# Altium PCB HotBed-24V.PcbDoc (part 2 of 3)
Units mil, origin at the board's own origin, x right, y up, seen from the top; angles counter-clockwise.
Board outline 5171.49 x 4724.57 mil, 2 copper layers (Top Layer, Bottom Layer); 4 components, 1 nets, 12 pads, 0 vias.
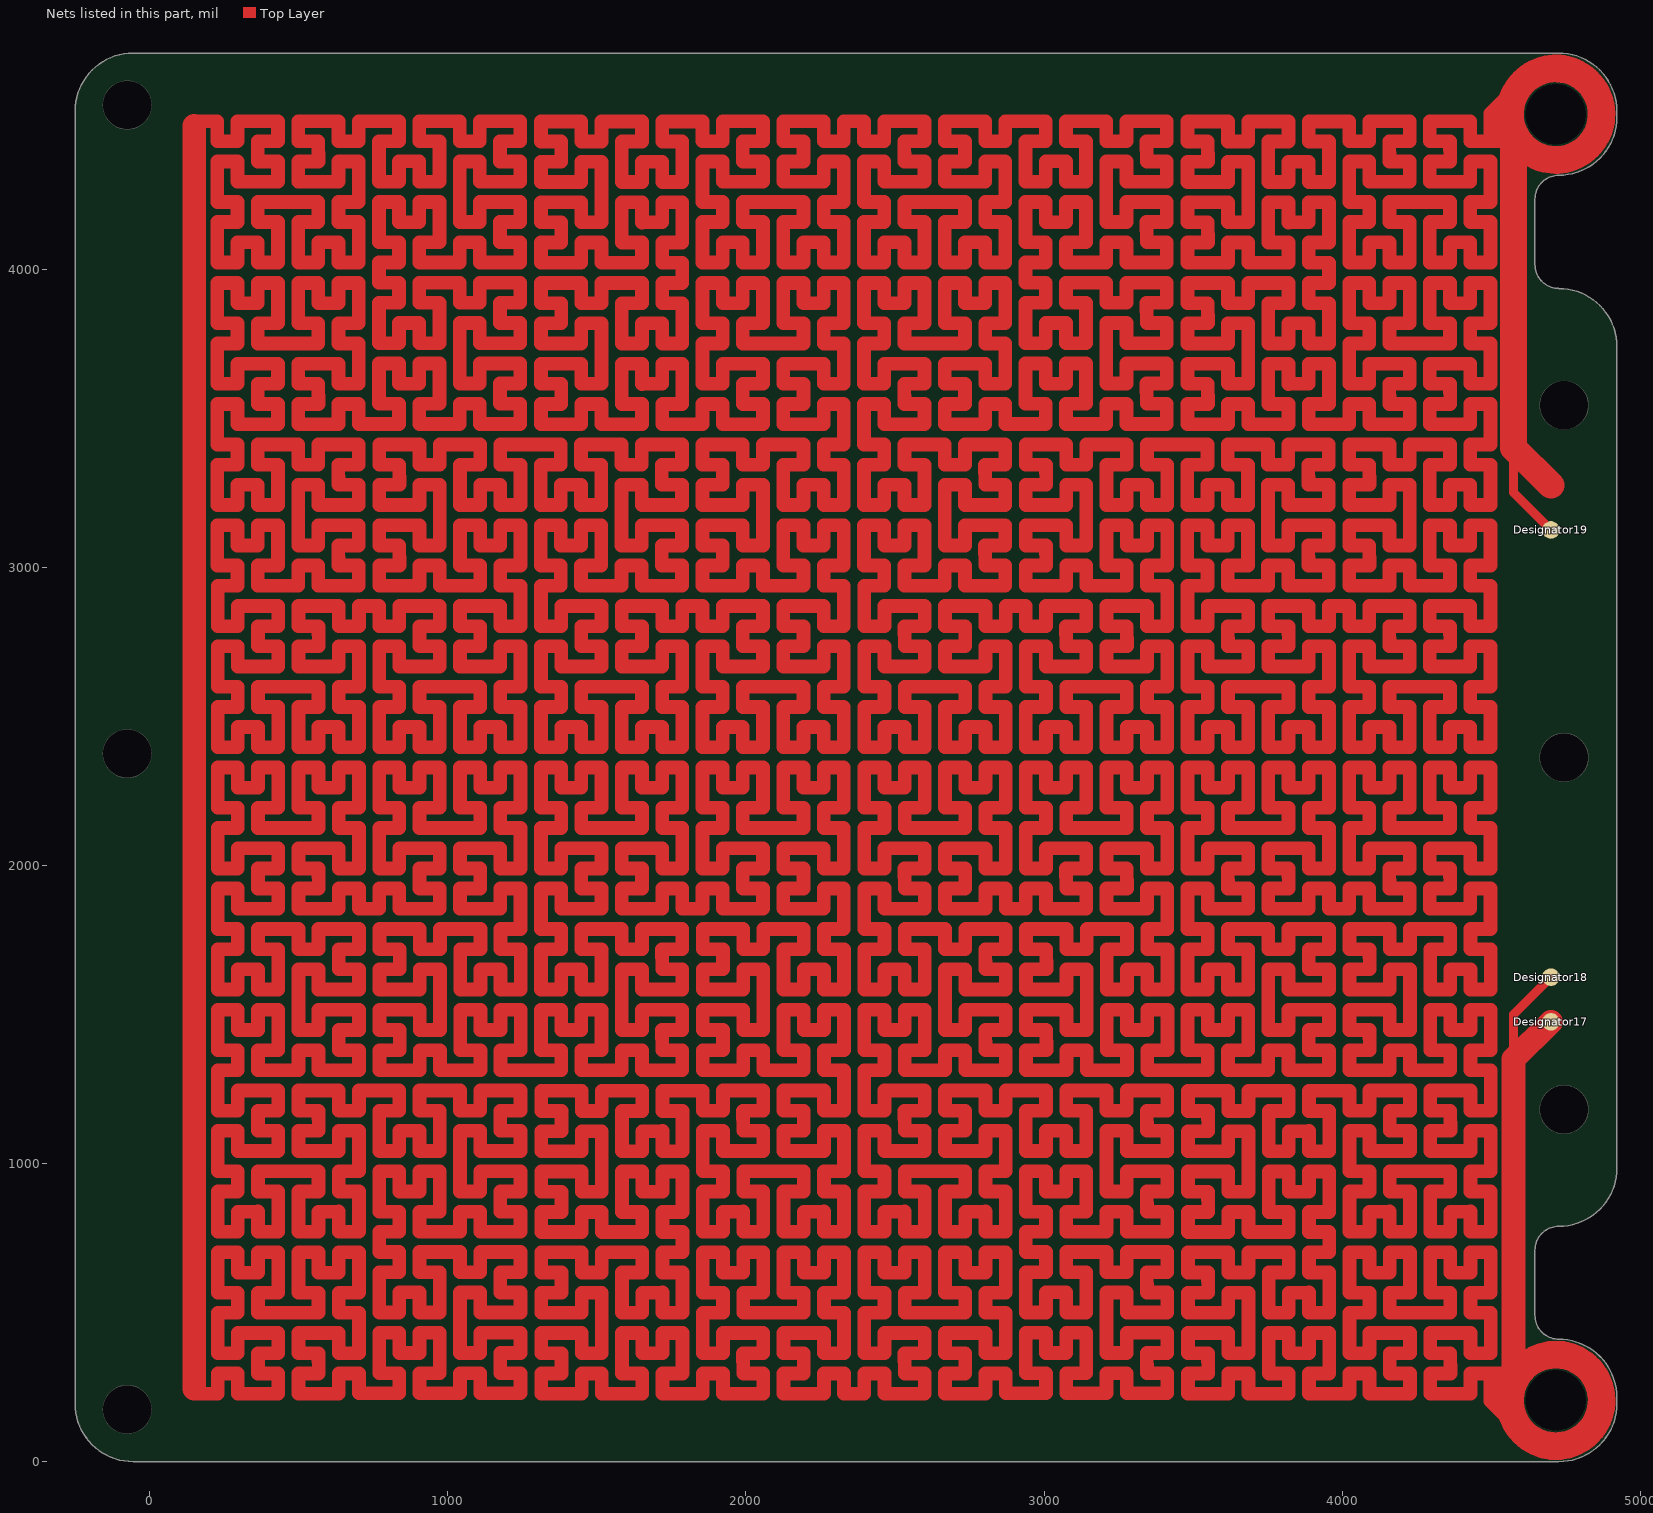
[diagram p2: the nets of this part, all layers, seen from the top]

## Nets (pads, with @x,y where several pads share a name; then routed paths per layer and width w, separated by ;. In a path a pad name is that pad's centre, name@x,y a point inside that pad or via, vN(x,y) a via of type N, cw(c..) or ccw(c..) an arc to the next point about the centre after c; other vN are vias at no path point) (continued)
Bed: (continued)
  Top Layer w46.06: 149.41,228.15 228.15,228.15 228.15,295.87 295.87,295.87 295.87,228.15 431.3,228.15 431.3,295.87 363.58,295.87 363.15,363.58 ; 149.41,4496.26 227.17,4496.26 227.17,4428.54 294.88,4428.54 294.88,4496.26 430.32,4496.26 430.32,4428.54 362.6,4428.54 ; 294.88,3072.8 362.6,3073.23 362.6,3140.95 430.32,3140.95 430.32,3005.51 362.6,3005.51 362.6,2937.8 498.03,2937.8 498.03,3005.51 565.75,3005.51 565.75,2937.8 701.18,2937.8 701.18,3005.51 633.47,3005.51 633.03,3073.23 ; 294.88,3073.23 294.88,3140.95 227.17,3140.95 227.17,3005.51 294.88,3005.51 294.88,2937.8 228.15,2937.8 228.15,2802.36 295.87,2802.36 295.87,2870.08 431.3,2870.08 431.3,2802.36 363.58,2802.36 ; 294.88,3885.39 362.6,3885.83 362.6,3953.54 430.32,3953.54 430.32,3818.11 362.6,3818.11 362.6,3750.39 565.75,3750.39 565.75,3818.11 498.03,3818.11 498.03,3953.54 565.75,3953.54 565.75,3885.83 ; 294.88,3885.83 294.88,3953.54 227.17,3953.54 227.17,3818.11 294.88,3818.11 294.88,3750.39 227.17,3750.39 227.17,3614.96 294.88,3614.96 294.88,3682.68 430.32,3682.68 430.32,3614.96 362.6,3614.96 ; 295.87,634.02 363.58,634.45 363.58,702.17 431.3,702.17 431.3,566.73 363.58,566.73 363.58,499.02 566.73,499.02 566.73,566.73 499.02,566.73 499.02,702.17 566.73,702.17 566.73,634.45 ; 295.87,634.45 295.87,702.17 228.15,702.17 228.15,566.73 295.87,566.73 295.87,499.02 228.15,499.02 228.15,363.58 295.87,363.58 295.87,431.3 431.3,431.3 431.3,363.58 363.58,363.58 ; 295.87,1447.6 363.58,1448.03 363.58,1515.75 431.3,1515.75 431.3,1380.32 363.58,1380.32 363.58,1312.6 499.02,1312.6 499.02,1380.32 566.73,1380.32 566.73,1312.6 702.17,1312.6 702.17,1380.32 634.45,1380.32 634.02,1448.03 ; 295.87,1448.03 295.87,1515.75 228.15,1515.75 228.15,1380.32 295.87,1380.32 295.87,1312.6 228.15,1312.6 228.15,1177.17 295.87,1177.17 295.87,1244.88 431.3,1244.88 431.3,1177.17 363.58,1177.17 ; 295.87,2260.2 363.58,2260.63 363.58,2328.35 431.3,2328.35 431.3,2192.91 363.58,2192.91 363.58,2125.2 566.73,2125.2 566.73,2192.91 499.02,2192.91 499.02,2328.35 566.73,2328.35 566.73,2260.63 ; 295.87,2260.63 295.87,2328.35 228.15,2328.35 228.15,2192.91 295.87,2192.91 295.87,2125.2 228.15,2125.2 228.15,1989.76 295.87,1989.76 295.87,2057.48 431.3,2057.48 431.3,1989.76 363.58,1989.76 ; 362.17,3614.96 362.6,3547.25 430.32,3547.25 430.32,3479.53 294.88,3479.53 294.88,3547.25 227.17,3547.25 227.17,3411.81 294.88,3411.81 294.88,3344.1 227.17,3344.1 227.17,3208.66 294.88,3208.66 294.88,3276.38 362.6,3276.81 ; 362.17,4428.54 362.6,4360.83 430.32,4360.83 430.32,4293.11 294.88,4293.11 294.88,4360.83 227.17,4360.83 227.17,4225.39 294.88,4225.39 294.88,4157.68 227.17,4157.68 227.17,4022.25 294.88,4022.25 294.88,4089.96 362.6,4090.39 ; 362.6,3276.38 362.6,3208.66 430.32,3208.66 430.32,3344.1 362.6,3344.1 362.6,3411.81 498.03,3411.81 498.03,3344.1 565.75,3344.1 565.75,3411.81 701.18,3411.81 701.18,3344.1 633.47,3344.1 ; 362.6,4089.96 362.6,4022.25 430.32,4022.25 430.32,4157.68 362.6,4157.68 362.6,4225.39 565.75,4225.39 565.75,4157.68 498.03,4157.68 498.03,4022.25 565.75,4022.25 565.75,4089.96 633.47,4090.39 ; 363.15,1177.17 363.58,1109.45 431.3,1109.45 431.3,1041.73 295.87,1041.73 295.87,1109.45 228.15,1109.45 228.15,974.02 295.87,974.02 295.87,906.3 228.15,906.3 228.15,770.87 295.87,770.87 295.87,838.58 363.58,839.02 ; 363.15,1989.76 363.58,1922.05 431.3,1922.05 431.3,1854.33 295.87,1854.33 295.87,1922.05 228.15,1922.05 228.15,1786.62 295.87,1786.62 295.87,1718.9 228.15,1718.9 228.15,1583.47 295.87,1583.47 295.87,1651.18 363.58,1651.62 ; 363.15,2802.36 363.58,2734.65 431.3,2734.65 431.3,2666.93 295.87,2666.93 295.87,2734.65 228.15,2734.65 228.15,2599.21 295.87,2599.21 295.87,2531.5 228.15,2531.5 228.15,2396.06 295.87,2396.06 295.87,2463.78 363.58,2464.21 ; 363.58,838.58 363.58,770.87 431.3,770.87 431.3,906.3 363.58,906.3 363.58,974.02 566.73,974.02 566.73,906.3 499.02,906.3 499.02,770.87 566.73,770.87 566.73,838.58 634.45,839.02 ; 363.58,1651.18 363.58,1583.47 431.3,1583.47 431.3,1718.9 363.58,1718.9 363.58,1786.62 499.02,1786.62 499.02,1718.9 566.73,1718.9 566.73,1786.62 702.17,1786.62 702.17,1718.9 634.45,1718.9 ; 363.58,2463.78 363.58,2396.06 431.3,2396.06 431.3,2531.5 363.58,2531.5 363.58,2599.21 566.73,2599.21 566.73,2531.5 499.02,2531.5 499.02,2396.06 566.73,2396.06 566.73,2463.78 634.45,2464.21 ; 565.75,3547.25 498.03,3547.25 498.03,3479.53 633.47,3479.53 633.47,3547.25 701.18,3547.25 701.18,3480.51 836.61,3480.51 836.61,3548.23 768.9,3548.23 768.9,3683.66 836.61,3683.66 836.61,3615.95 ; 565.75,3885.39 633.47,3885.83 633.47,3953.54 701.18,3953.54 701.18,3818.11 633.47,3818.11 633.47,3750.39 701.18,3750.39 701.18,3614.96 633.47,3614.96 633.47,3682.68 498.03,3682.68 498.03,3614.96 565.75,3614.96 566.18,3547.25 ; 565.75,4360.83 498.03,4360.83 498.03,4293.11 633.47,4293.11 633.47,4360.83 701.18,4360.83 701.18,4225.39 633.47,4225.39 633.47,4157.68 701.18,4157.68 701.18,4022.25 633.47,4022.25 633.47,4089.96 ; 566.18,4360.83 565.75,4428.54 498.03,4428.54 498.03,4496.26 633.47,4496.26 633.47,4428.54 701.18,4428.54 701.18,4496.26 836.62,4496.26 836.62,4428.54 768.9,4428.54 768.9,4293.11 836.62,4293.11 836.62,4360.83 904.33,4361.26 ; 566.73,295.87 499.02,295.87 499.02,228.15 634.45,228.15 634.45,295.87 702.17,295.87 702.17,229.13 837.6,229.13 837.6,296.85 769.88,296.85 769.88,432.28 837.6,432.28 837.6,364.57 ; 566.73,634.02 634.45,634.45 634.45,702.17 702.17,702.17 702.17,566.73 634.45,566.73 634.45,499.02 702.17,499.02 702.17,363.58 634.45,363.58 634.45,431.3 499.02,431.3 499.02,363.58 566.73,363.58 567.17,295.87 ; 566.73,1109.45 499.02,1109.45 499.02,1041.73 634.45,1041.73 634.45,1109.45 702.17,1109.45 702.17,974.02 634.45,974.02 634.45,906.3 702.17,906.3 702.17,770.87 634.45,770.87 634.45,838.58 ; 566.73,1922.05 499.02,1922.05 499.02,1854.33 634.45,1854.33 634.45,1922.05 702.17,1922.05 702.17,1854.33 769.88,1854.33 769.88,1922.05 837.6,1922.05 837.6,1854.33 973.03,1854.33 973.03,1922.05 905.32,1922.05 904.88,1989.76 ; 566.73,2260.2 634.45,2260.63 634.45,2328.35 702.17,2328.35 702.17,2192.91 634.45,2192.91 634.45,2125.2 702.17,2125.2 702.17,1989.76 634.45,1989.76 634.45,2057.48 499.02,2057.48 499.02,1989.76 566.73,1989.76 567.17,1922.05 ; 566.73,2734.65 499.02,2734.65 499.02,2666.93 634.45,2666.93 634.45,2734.65 702.17,2734.65 702.17,2599.21 634.45,2599.21 634.45,2531.5 702.17,2531.5 702.17,2396.06 634.45,2396.06 634.45,2463.78 ; 567.17,1109.45 566.73,1177.17 499.02,1177.17 499.02,1244.88 634.45,1244.88 634.45,1177.17 702.17,1177.17 702.17,1244.88 837.6,1244.88 837.6,1177.17 769.88,1177.17 769.88,1041.73 837.6,1041.73 837.6,1109.45 905.32,1109.88 ; 567.17,2734.65 566.73,2802.36 499.02,2802.36 499.02,2870.08 634.45,2870.08 634.45,2802.36 702.17,2802.36 702.17,2870.08 769.88,2870.08 769.88,2802.36 837.6,2802.36 837.6,2870.08 973.03,2870.08 973.03,2802.36 905.32,2802.36 ; 633.03,3344.1 633.47,3276.38 701.18,3276.38 701.18,3208.66 565.75,3208.66 565.75,3276.38 498.03,3276.38 498.03,3073.23 565.75,3073.23 565.75,3140.95 701.18,3140.95 701.18,3073.23 633.47,3073.23 ; 634.02,1718.9 634.45,1651.18 702.17,1651.18 702.17,1583.47 566.73,1583.47 566.73,1651.18 499.02,1651.18 499.02,1448.03 566.73,1448.03 566.73,1515.75 702.17,1515.75 702.17,1448.03 634.45,1448.03 ; 836.61,3615.51 904.33,3615.95 904.33,3683.66 972.05,3683.66 972.05,3548.23 904.33,3548.23 904.33,3480.51 1039.76,3480.51 1039.76,3548.23 1107.48,3548.23 1107.48,3480.51 1242.91,3480.51 1242.91,3548.23 1175.2,3548.23 1174.76,3615.95 ; 836.62,4157.24 904.33,4157.68 904.33,4225.39 972.05,4225.39 972.05,4089.96 904.33,4089.96 904.33,4022.24 1039.76,4022.24 1039.76,4089.96 1107.48,4089.96 1107.48,4022.25 1242.91,4022.25 1242.91,4089.96 1175.2,4089.96 1174.76,4157.68 ; 836.62,4157.68 836.62,4225.39 768.9,4225.39 768.9,4089.96 836.62,4089.96 836.62,4022.24 768.9,4022.24 768.9,3954.53 836.61,3954.53 836.61,3886.81 768.9,3886.81 768.9,3751.38 836.61,3751.38 836.61,3819.1 904.33,3819.53 ; 837.6,364.13 905.32,364.57 905.32,432.28 973.03,432.28 973.03,296.85 905.32,296.85 905.32,229.13 1040.75,229.13 1040.75,296.85 1108.47,296.85 1108.47,229.13 1243.9,229.13 1243.9,296.85 1176.18,296.85 1175.75,364.57 ; 837.6,905.87 905.32,906.3 905.32,974.02 973.03,974.02 973.03,838.58 905.32,838.58 905.32,770.87 1040.75,770.87 1040.75,838.58 1108.47,838.58 1108.47,770.87 1243.9,770.87 1243.9,838.58 1176.18,838.58 1175.75,906.3 ; 837.6,906.3 837.6,974.02 769.88,974.02 769.88,838.58 837.6,838.58 837.6,770.87 769.88,770.87 769.88,703.15 837.6,703.15 837.6,635.43 769.88,635.43 769.88,500 837.6,500 837.6,567.72 905.32,568.15 ; 837.6,2260.2 905.32,2260.63 905.32,2328.35 973.03,2328.35 973.03,2192.91 905.32,2192.91 905.32,2125.2 1108.47,2125.2 1108.47,2192.91 1040.75,2192.91 1040.75,2328.35 1108.47,2328.35 1108.47,2260.63 ; 837.6,2260.63 837.6,2328.35 769.88,2328.35 769.88,2192.91 837.6,2192.91 837.6,2125.2 769.88,2125.2 769.88,1989.76 837.6,1989.76 837.6,2057.48 973.03,2057.48 973.03,1989.76 905.32,1989.76 ; 837.6,3005.51 769.88,3005.51 769.88,2937.8 905.32,2937.8 905.32,3005.51 973.03,3005.51 973.03,2937.8 1108.47,2937.8 1108.47,3005.51 1040.75,3005.51 1040.75,3140.95 1108.47,3140.95 1108.47,3073.23 ; 837.6,3276.38 769.88,3276.38 769.88,3208.66 905.32,3208.66 905.32,3276.38 973.03,3276.38 973.03,3073.23 905.32,3073.23 905.32,3140.95 769.88,3140.95 769.88,3073.23 837.6,3073.23 838.03,3005.51 ; 838.03,3276.38 837.6,3344.1 769.88,3344.1 769.88,3411.81 905.32,3411.81 905.32,3344.1 973.03,3344.1 973.03,3411.81 1108.47,3411.81 1108.47,3344.1 1040.75,3344.1 1040.75,3208.66 1108.47,3208.66 1108.47,3276.38 1176.18,3276.81 ; 838.58,1380.32 770.87,1380.32 770.87,1312.6 906.3,1312.6 906.3,1380.32 974.02,1380.32 974.02,1312.6 1109.45,1312.6 1109.45,1380.32 1041.73,1380.32 1041.73,1515.75 1109.45,1515.75 1109.45,1448.03 ; 838.58,1651.18 770.87,1651.18 770.87,1583.47 906.3,1583.47 906.3,1651.18 974.02,1651.18 974.02,1448.03 906.3,1448.03 906.3,1515.75 770.87,1515.75 770.87,1448.03 838.58,1448.03 839.02,1380.32 ; 839.02,1651.18 838.58,1718.9 770.87,1718.9 770.87,1786.61 906.3,1786.61 906.3,1718.9 974.02,1718.9 974.02,1786.61 1109.45,1786.61 1109.45,1718.9 1041.73,1718.9 1041.73,1583.47 1109.45,1583.47 1109.45,1651.18 1177.17,1651.61 ; 904.33,3819.1 904.33,3751.38 972.05,3751.38 972.05,3886.81 904.33,3886.81 904.33,3954.53 1039.76,3954.53 1039.76,3886.81 1107.48,3886.81 1107.48,3954.53 1242.91,3954.53 1242.91,3886.81 1175.2,3886.81 ; 904.33,4360.83 904.33,4293.11 972.05,4293.11 972.05,4428.54 904.33,4428.54 904.33,4496.26 1039.76,4496.26 1039.76,4428.54 1107.48,4428.54 1107.48,4496.26 1242.91,4496.26 1242.91,4428.54 1175.2,4428.54 ; 904.88,2802.36 905.32,2734.65 973.03,2734.65 973.03,2666.93 837.6,2666.93 837.6,2734.65 769.88,2734.65 769.88,2599.21 837.6,2599.21 837.6,2531.5 769.88,2531.5 769.88,2396.06 837.6,2396.06 837.6,2463.78 905.32,2464.21 ; 905.32,567.72 905.32,500 973.03,500 973.03,635.43 905.32,635.43 905.32,703.15 1040.75,703.15 1040.75,635.43 1108.47,635.43 1108.47,703.15 1243.9,703.15 1243.9,635.43 1176.18,635.43 ; 905.32,1109.45 905.32,1041.73 973.03,1041.73 973.03,1177.17 905.32,1177.17 905.32,1244.88 1040.75,1244.88 1040.75,1177.17 1108.47,1177.17 1108.47,1244.88 1243.9,1244.88 1243.9,1177.17 1176.18,1177.17 ; 905.32,2463.78 905.32,2396.06 973.03,2396.06 973.03,2531.5 905.32,2531.5 905.32,2599.21 1108.47,2599.21 1108.47,2531.5 1040.75,2531.5 1040.75,2396.06 1108.47,2396.06 1108.47,2463.78 1176.18,2464.21 ; 1108.47,1922.05 1040.75,1922.05 1040.75,1854.33 1176.18,1854.33 1176.18,1922.05 1243.9,1922.05 1243.9,1786.61 1177.17,1786.61 1177.17,1718.9 1244.88,1718.9 1244.88,1583.47 1177.17,1583.47 1177.17,1651.18 ; 1108.47,2260.2 1176.18,2260.63 1176.18,2328.35 1243.9,2328.35 1243.9,2192.91 1176.18,2192.91 1176.18,2125.2 1243.9,2125.2 1243.9,1989.76 1176.18,1989.76 1176.18,2057.48 1040.75,2057.48 1040.75,1989.76 1108.47,1989.76 1108.9,1922.05 ; 1108.47,2734.65 1040.75,2734.65 1040.75,2666.93 1176.18,2666.93 1176.18,2734.65 1243.9,2734.65 1243.9,2599.21 1176.18,2599.21 1176.18,2531.5 1243.9,2531.5 1243.9,2396.06 1176.18,2396.06 1176.18,2463.78 ; 1108.47,3072.8 1176.18,3073.23 1176.18,3140.95 1243.9,3140.95 1243.9,3005.51 1176.18,3005.51 1176.18,2937.8 1243.9,2937.8 1243.9,2802.36 1176.18,2802.36 1176.18,2870.08 1040.75,2870.08 1040.75,2802.36 1108.47,2802.36 1108.9,2734.65 ; 1109.45,1447.6 1177.17,1448.03 1177.17,1515.75 1244.88,1515.75 1244.88,1380.32 1177.17,1380.32 1177.17,1312.6 1380.32,1312.6 1380.32,1380.32 1312.6,1380.32 1312.6,1515.75 1380.32,1515.75 1380.32,1448.03 ; 1174.76,3886.81 1175.2,3819.1 1242.91,3819.1 1242.91,3751.38 1107.48,3751.38 1107.48,3819.1 1039.76,3819.1 1039.76,3615.95 1107.48,3615.95 1107.48,3683.66 1242.91,3683.66 1242.91,3615.95 1175.2,3615.95 ; 1174.76,4428.54 1175.2,4360.83 1242.91,4360.83 1242.91,4293.11 1107.48,4293.11 1107.48,4360.83 1039.76,4360.83 1039.76,4157.68 1107.48,4157.68 1107.48,4225.39 1242.91,4225.39 1242.91,4157.68 1175.2,4157.68 ; 1175.75,635.43 1176.18,567.72 1243.9,567.72 1243.9,500 1108.47,500 1108.47,567.72 1040.75,567.72 1040.75,364.57 1108.47,364.57 1108.47,432.28 1243.9,432.28 1243.9,364.57 1176.18,364.57 ; 1175.75,1177.17 1176.18,1109.45 1243.9,1109.45 1243.9,1041.73 1108.47,1041.73 1108.47,1109.45 1040.75,1109.45 1040.75,906.3 1108.47,906.3 1108.47,974.02 1243.9,974.02 1243.9,906.3 1176.18,906.3 ; 1176.18,3276.38 1176.18,3208.66 1243.9,3208.66 1243.9,3344.1 1176.18,3344.1 1176.18,3411.81 1379.33,3411.81 1379.33,3344.1 1311.61,3344.1 1311.61,3208.66 1379.33,3208.66 1379.33,3276.38 1447.05,3276.81 ; 1379.33,3072.8 1447.05,3073.23 1447.05,3140.95 1514.76,3140.95 1514.76,3005.51 1447.05,3005.51 1447.05,2937.8 1582.48,2937.8 1582.48,3005.51 1650.2,3005.51 1650.2,2937.8 1785.63,2937.8 1785.63,3005.51 1717.91,3005.51 1717.48,3073.23 ; 1379.33,3073.23 1379.33,3140.95 1311.61,3140.95 1311.61,3005.51 1379.33,3005.51 1379.33,2937.8 1312.6,2937.8 1312.6,2802.36 1380.32,2802.36 1380.32,2870.08 1515.75,2870.08 1515.75,2802.36 1448.03,2802.36 ; 1380.32,1447.6 1448.03,1448.03 1448.03,1515.75 1515.75,1515.75 1515.75,1380.32 1448.03,1380.32 1448.03,1312.6 1583.47,1312.6 1583.47,1380.32 1651.18,1380.32 1651.18,1312.6 1786.61,1312.6 1786.61,1380.32 1718.9,1380.32 1718.47,1448.03 ; 1380.32,2260.2 1448.03,2260.63 1448.03,2328.35 1515.75,2328.35 1515.75,2192.91 1448.03,2192.91 1448.03,2125.2 1651.18,2125.2 1651.18,2192.91 1583.47,2192.91 1583.47,2328.35 1651.18,2328.35 1651.18,2260.63 ; 1380.32,2260.63 1380.32,2328.35 1312.6,2328.35 1312.6,2192.91 1380.32,2192.91 1380.32,2125.2 1312.6,2125.2 1312.6,1989.76 1380.32,1989.76 1380.32,2057.48 1515.75,2057.48 1515.75,1989.76 1448.03,1989.76 ; 1380.32,3547.24 1312.6,3547.24 1312.6,3479.53 1448.03,3479.53 1448.03,3547.24 1515.75,3547.24 1515.75,3479.53 1651.18,3479.53 1651.18,3547.24 1583.47,3547.24 1583.47,3682.68 1651.18,3682.68 1651.18,3614.96 ; 1380.32,3818.11 1312.6,3818.11 1312.6,3750.39 1448.03,3750.39 1448.03,3818.11 1515.75,3818.11 1515.75,3614.96 1448.03,3614.96 1448.03,3682.68 1312.6,3682.68 1312.6,3614.96 1380.32,3614.96 1380.75,3547.24 ; 1380.32,4088.98 1312.6,4088.98 1312.6,4021.26 1448.03,4021.26 1448.03,4088.98 1515.75,4088.98 1515.75,4021.26 1651.18,4021.26 1651.18,4088.98 1583.47,4088.98 1583.47,4224.41 1651.18,4224.41 1651.18,4156.69 ; 1380.32,4359.84 1312.6,4359.84 1312.6,4292.13 1448.03,4292.13 1448.03,4359.84 1515.75,4359.84 1515.75,4156.69 1448.03,4156.69 1448.03,4224.41 1312.6,4224.41 1312.6,4156.69 1380.32,4156.69 1380.75,4088.98 ; 1380.75,3818.11 1380.32,3885.83 1312.6,3885.83 1312.6,3953.54 1448.03,3953.54 1448.03,3885.83 1515.75,3885.83 1515.75,3953.54 1651.18,3953.54 1651.18,3885.83 1583.46,3885.83 1583.46,3750.39 1651.18,3750.39 1651.18,3818.11 1718.9,3818.54 ; 1380.75,4359.84 1380.32,4427.56 1312.6,4427.56 1312.6,4495.28 1448.03,4495.28 1448.03,4427.56 1515.75,4427.56 1515.75,4495.28 1651.18,4495.28 1651.18,4427.56 1583.47,4427.56 1583.47,4292.13 1651.18,4292.13 1651.18,4359.84 1718.9,4360.28 ; 1381.3,295.87 1313.58,295.87 1313.58,228.15 1449.02,228.15 1449.02,295.87 1516.73,295.87 1516.73,228.15 1652.17,228.15 1652.17,295.87 1584.45,295.87 1584.45,431.3 1652.17,431.3 1652.17,363.58 ; 1381.3,566.73 1313.58,566.73 1313.58,499.02 1449.02,499.02 1449.02,566.73 1516.73,566.73 1516.73,363.58 1449.02,363.58 1449.02,431.3 1313.58,431.3 1313.58,363.58 1381.3,363.58 1381.73,295.87 ; 1381.3,837.6 1313.58,837.6 1313.58,769.88 1449.02,769.88 1449.02,837.6 1516.73,837.6 1516.73,769.88 1652.17,769.88 1652.17,837.6 1584.45,837.6 1584.45,973.03 1652.17,973.03 1652.17,905.32 ; 1381.3,1108.47 1313.58,1108.47 1313.58,1040.75 1449.02,1040.75 1449.02,1108.47 1516.73,1108.47 1516.73,905.32 1449.02,905.32 1449.02,973.03 1313.58,973.03 1313.58,905.32 1381.3,905.32 1381.73,837.6 ; 1381.73,566.73 1381.3,634.45 1313.58,634.45 1313.58,702.17 1449.02,702.17 1449.02,634.45 1516.73,634.45 1516.73,702.17 1652.17,702.17 1652.17,634.45 1584.45,634.45 1584.45,499.02 1652.17,499.02 1652.17,566.73 1719.88,567.17 ; 1381.73,1108.47 1381.3,1176.18 1313.58,1176.18 1313.58,1243.9 1449.02,1243.9 1449.02,1176.18 1516.73,1176.18 1516.73,1243.9 1652.17,1243.9 1652.17,1176.18 1584.45,1176.18 1584.45,1040.75 1652.17,1040.75 1652.17,1108.47 1719.88,1108.9 ; 1447.05,3276.38 1447.05,3208.66 1514.76,3208.66 1514.76,3344.1 1447.05,3344.1 1447.05,3411.81 1582.48,3411.81 1582.48,3344.1 1650.2,3344.1 1650.2,3411.81 1785.63,3411.81 1785.63,3344.1 1717.91,3344.1 ; 1447.6,1989.76 1448.03,1922.05 1515.75,1922.05 1515.75,1854.33 1380.32,1854.33 1380.32,1922.05 1312.6,1922.05 1312.6,1786.61 1380.32,1786.61 1380.32,1718.9 1312.6,1718.9 1312.6,1583.47 1380.32,1583.47 1380.32,1651.18 1448.03,1651.61 ; 1447.6,2802.36 1448.03,2734.65 1515.75,2734.65 1515.75,2666.93 1380.32,2666.93 1380.32,2734.65 1312.6,2734.65 1312.6,2599.21 1380.32,2599.21 1380.32,2531.5 1312.6,2531.5 1312.6,2396.06 1380.32,2396.06 1380.32,2463.78 1448.03,2464.21 ; 1448.03,1651.18 1448.03,1583.47 1515.75,1583.47 1515.75,1718.9 1448.03,1718.9 1448.03,1786.61 1583.47,1786.61 1583.47,1718.9 1651.18,1718.9 1651.18,1786.61 1786.61,1786.61 1786.61,1718.9 1718.9,1718.9 ; 1448.03,2463.78 1448.03,2396.06 1515.75,2396.06 1515.75,2531.5 1448.03,2531.5 1448.03,2599.21 1651.18,2599.21 1651.18,2531.5 1583.47,2531.5 1583.47,2396.06 1651.18,2396.06 1651.18,2463.78 1718.9,2464.21 ; 1651.18,1922.05 1583.47,1922.05 1583.47,1854.33 1718.9,1854.33 1718.9,1922.05 1786.62,1922.05 1786.62,1854.33 1854.33,1854.33 1854.33,1922.05 1922.05,1922.05 1922.05,1854.33 2057.48,1854.33 2057.48,1922.05 1989.76,1922.05 1989.33,1989.76 ; 1651.18,2260.2 1718.9,2260.63 1718.9,2328.35 1786.61,2328.35 1786.61,2192.91 1718.9,2192.91 1718.9,2125.2 1786.61,2125.2 1786.62,1989.76 1718.9,1989.76 1718.9,2057.48 1583.47,2057.48 1583.47,1989.76 1651.18,1989.76 1651.62,1922.05 ; 1651.18,2734.65 1583.47,2734.65 1583.47,2666.93 1718.9,2666.93 1718.9,2734.65 1786.61,2734.65 1786.61,2599.21 1718.9,2599.21 1718.9,2531.5 1786.61,2531.5 1786.61,2396.06 1718.9,2396.06 1718.9,2463.78 ; 1651.18,3614.53 1718.9,3614.96 1718.9,3682.68 1786.61,3682.68 1786.61,3547.24 1718.9,3547.24 1718.9,3479.53 1854.33,3479.53 1854.33,3547.24 1922.05,3547.24 1922.05,3479.53 2057.48,3479.53 2057.48,3547.24 1989.76,3547.24 1989.33,3614.96 ; 1651.18,4156.26 1718.9,4156.69 1718.9,4224.41 1786.61,4224.41 1786.61,4088.98 1718.9,4088.98 1718.9,4021.26 1786.61,4021.26 1786.61,3953.54 1718.9,3953.54 1718.9,3885.83 1786.61,3885.83 1786.61,3750.39 1718.9,3750.39 1718.9,3818.11 ; 1651.61,2734.65 1651.18,2802.36 1583.47,2802.36 1583.47,2870.08 1718.9,2870.08 1718.9,2802.36 1786.61,2802.36 1786.61,2870.08 1854.33,2870.08 1854.33,2802.36 1922.05,2802.36 1922.05,2870.08 2057.48,2870.08 2057.48,2802.36 1989.76,2802.36 ; 1652.17,363.15 1719.88,363.58 1719.88,431.3 1787.6,431.3 1787.6,295.87 1719.88,295.87 1719.88,228.15 1855.32,228.15 1855.32,295.87 1923.03,295.87 1923.03,228.15 2058.46,228.15 2058.46,295.87 1990.75,295.87 1990.32,363.58 ; 1652.17,904.88 1719.88,905.32 1719.88,973.03 1787.6,973.03 1787.6,837.6 1719.88,837.6 1719.88,769.88 1787.6,769.88 1787.6,702.17 1719.88,702.17 1719.88,634.45 1787.6,634.45 1787.6,499.02 1719.88,499.02 1719.88,566.73 ; 1717.48,3344.1 1717.91,3276.38 1785.63,3276.38 1785.63,3208.66 1650.2,3208.66 1650.2,3276.38 1582.48,3276.38 1582.48,3073.23 1650.2,3073.23 1650.2,3140.95 1785.63,3140.95 1785.63,3073.23 1717.91,3073.23 ; 1718.47,1718.9 1718.9,1651.18 1786.61,1651.18 1786.61,1583.47 1651.18,1583.47 1651.18,1651.18 1583.47,1651.18 1583.47,1448.03 1651.18,1448.03 1651.18,1515.75 1786.61,1515.75 1786.61,1448.03 1718.9,1448.03 ; 1718.9,4359.84 1718.9,4292.13 1786.61,4292.13 1786.61,4427.56 1718.9,4427.56 1718.9,4495.28 1854.33,4495.28 1854.33,4428.54 1922.05,4428.54 1922.05,4496.26 2057.48,4496.26 2057.48,4428.54 1989.76,4428.54 ; 1719.88,1108.47 1719.88,1040.75 1787.6,1040.75 1787.6,1176.18 1719.88,1176.18 1719.88,1243.9 1855.32,1243.9 1855.32,1177.17 1923.03,1177.17 1923.03,1244.88 2058.47,1244.88 2058.47,1177.17 1990.75,1177.17 ; 1922.05,2260.2 1989.76,2260.63 1989.76,2328.35 2057.48,2328.35 2057.48,2192.91 1989.76,2192.91 1989.76,2125.2 2192.91,2125.2 2192.91,2192.91 2125.2,2192.91 2125.2,2328.35 2192.91,2328.35 2192.91,2260.63 ; 1922.05,2260.63 1922.05,2328.35 1854.33,2328.35 1854.33,2192.91 1922.05,2192.91 1922.05,2125.2 1854.33,2125.2 1854.33,1989.76 1922.05,1989.76 1922.05,2057.48 2057.48,2057.48 2057.48,1989.76 1989.76,1989.76 ; 1922.05,3005.51 1854.33,3005.51 1854.33,2937.8 1989.76,2937.8 1989.76,3005.51 2057.48,3005.51 2057.48,2937.8 2192.91,2937.8 2192.91,3005.51 2125.2,3005.51 2125.2,3140.95 2192.91,3140.95 2192.91,3073.23 ; 1922.05,3276.38 1854.33,3276.38 1854.33,3208.66 1989.76,3208.66 1989.76,3276.38 2057.48,3276.38 2057.48,3073.23 1989.76,3073.23 1989.76,3140.95 1854.33,3140.95 1854.33,3073.23 1922.05,3073.23 1922.48,3005.51 ; 1922.05,3885.39 1989.76,3885.83 1989.76,3953.54 2057.48,3953.54 2057.48,3818.11 1989.76,3818.11 1989.76,3750.39 2192.91,3750.39 2192.91,3818.11 2125.2,3818.11 2125.2,3953.54 2192.91,3953.54 2192.91,3885.83 ; 1922.05,3885.83 1922.05,3953.54 1854.33,3953.54 1854.33,3818.11 1922.05,3818.11 1922.05,3750.39 1854.33,3750.39 1854.33,3614.96 1922.05,3614.96 1922.05,3682.68 2057.48,3682.68 2057.48,3614.96 1989.76,3614.96 ; 1922.48,3276.38 1922.05,3344.09 1854.33,3344.09 1854.33,3411.81 1989.76,3411.81 1989.76,3344.09 2057.48,3344.09 2057.48,3411.81 2192.91,3411.81 2192.91,3344.1 2125.2,3344.1 2125.2,3208.66 2192.91,3208.66 2192.91,3276.38 2260.63,3276.81 ; 1923.03,634.02 1990.75,634.45 1990.75,702.17 2058.46,702.17 2058.46,566.73 1990.75,566.73 1990.75,499.02 2193.9,499.02 2193.9,566.73 2126.18,566.73 2126.18,702.17 2193.9,702.17 2193.9,634.45 ; 1923.03,634.45 1923.03,702.17 1855.32,702.17 1855.32,566.73 1923.03,566.73 1923.03,499.02 1855.32,499.02 1855.32,363.58 1923.03,363.58 1923.03,431.3 2058.46,431.3 2058.46,363.58 1990.75,363.58 ; 1923.03,1380.32 1855.32,1380.32 1855.32,1312.6 1990.75,1312.6 1990.75,1380.32 2058.47,1380.32 2058.47,1312.6 2193.9,1312.6 2193.9,1380.32 2126.18,1380.32 2126.18,1515.75 2193.9,1515.75 2193.9,1448.03 ; 1923.03,1651.18 1855.32,1651.18 1855.32,1583.47 1990.75,1583.47 1990.75,1651.18 2058.47,1651.18 2058.47,1448.03 1990.75,1448.03 1990.75,1515.75 1855.32,1515.75 1855.32,1448.03 1923.03,1448.03 1923.47,1380.32 ; 1923.47,1651.18 1923.03,1718.9 1855.32,1718.9 1855.32,1786.61 1990.75,1786.61 1990.75,1718.9 2058.47,1718.9 2058.47,1786.61 2193.9,1786.61 2193.9,1718.9 2126.18,1718.9 2126.18,1583.47 2193.9,1583.47 2193.9,1651.18 2261.61,1651.61 ; 1989.33,2802.36 1989.76,2734.65 2057.48,2734.65 2057.48,2666.93 1922.05,2666.93 1922.05,2734.65 1854.33,2734.65 1854.33,2599.21 1922.05,2599.21 1922.05,2531.5 1854.33,2531.5 1854.33,2396.06 1922.05,2396.06 1922.05,2463.78 1989.76,2464.21 ; 1989.33,4428.54 1989.76,4360.83 2057.48,4360.83 2057.48,4293.11 1922.05,4293.11 1922.05,4360.83 1854.33,4360.83 1854.33,4225.39 1922.05,4225.39 1922.05,4157.68 1854.33,4157.68 1854.33,4022.24 1922.05,4022.24 1922.05,4089.96 1989.76,4090.39 ; 1989.76,2463.78 1989.76,2396.06 2057.48,2396.06 2057.48,2531.5 1989.76,2531.5 1989.76,2599.21 2192.91,2599.21 2192.91,2531.5 2125.2,2531.5 2125.2,2396.06 2192.91,2396.06 2192.91,2463.78 2260.63,2464.21 2260.63,2396.5 2328.35,2396.5 2328.35,2531.5 2260.63,2531.5 2260.63,2599.21 2328.35,2599.21 2328.35,2734.65 2260.63,2734.65 2260.63,2666.93 2125.2,2666.93 2125.2,2734.65 2192.91,2734.65 ; 1989.76,4089.96 1989.76,4022.24 2057.48,4022.24 2057.48,4157.68 1989.76,4157.68 1989.76,4225.39 2192.91,4225.39 2192.91,4157.68 2125.2,4157.68 2125.2,4022.24 2192.91,4022.24 2192.91,4089.96 2260.63,4090.39 ; 1990.32,1177.17 1990.75,1109.45 2058.47,1109.45 2058.47,1041.73 1923.03,1041.73 1923.03,1109.45 1855.32,1109.45 1855.32,974.02 1923.03,974.02 1923.03,906.3 1855.32,906.3 1855.32,770.87 1923.03,770.87 1923.03,838.58 1990.75,839.02 ; 1990.75,838.58 1990.75,770.87 2058.47,770.87 2058.47,906.3 1990.75,906.3 1990.75,974.02 2193.9,974.02 2193.9,906.3 2126.18,906.3 2126.18,770.87 2193.9,770.87 2193.9,838.58 2261.61,839.02 ; 2192.91,1922.05 2125.2,1922.05 2125.2,1854.33 2260.63,1854.33 2260.63,1922.05 2328.35,1922.05 2328.35,1786.61 2261.61,1786.61 2261.61,1718.9 2329.33,1718.9 2329.33,1583.47 2261.61,1583.47 2261.61,1651.18 ; 2192.91,2260.2 2260.63,2260.63 2260.63,2328.35 2328.35,2328.35 2328.35,2192.91 2260.63,2192.91 2260.63,2125.2 2328.35,2125.2 2328.35,1989.76 2260.63,1989.76 2260.63,2057.48 2125.2,2057.48 2125.2,1989.76 2192.91,1989.76 2193.35,1922.05 ; 2192.91,3072.8 2260.63,3073.23 2260.63,3140.95 2328.35,3140.95 2328.35,3005.51 2260.63,3005.51 2260.63,2937.8 2328.35,2937.8 2328.35,2802.36 2260.63,2802.36 2260.63,2870.08 2125.2,2870.08 2125.2,2802.36 2192.91,2802.36 2193.35,2734.65 ; 2192.91,3547.24 2125.2,3547.24 2125.2,3479.53 2260.63,3479.53 2260.63,3547.24 2328.35,3547.24 2328.35,3411.81 2260.63,3411.81 2260.63,3344.1 2328.35,3344.1 2328.35,3208.66 2260.63,3208.66 2260.63,3276.38 ; 2192.91,3885.39 2260.63,3885.83 2260.63,3953.54 2328.35,3953.54 2328.35,3818.11 2260.63,3818.11 2260.63,3750.39 2328.35,3750.39 2328.35,3614.96 2260.63,3614.96 2260.63,3682.68 2125.2,3682.68 2125.2,3614.96 2192.91,3614.96 2193.35,3547.24 ; 2192.91,4360.83 2125.2,4360.83 2125.2,4293.11 2260.63,4293.11 2260.63,4360.83 2328.35,4360.83 2328.35,4225.39 2260.63,4225.39 2260.63,4157.68 2328.35,4157.68 2328.35,4022.24 2260.63,4022.24 2260.63,4089.96 ; 2193.35,4360.83 2192.91,4428.54 2125.2,4428.54 2125.2,4496.26 2260.63,4496.26 2260.63,4428.54 2328.35,4428.54 2328.35,4496.26 2396.06,4496.26 2396.06,4428.54 2463.78,4428.54 2463.78,4496.26 2599.21,4496.26 2599.21,4428.54 2531.5,4428.54 ; 2193.9,295.87 2126.18,295.87 2126.18,228.15 2261.61,228.15 2261.61,295.87 2329.33,295.87 2329.33,228.15 2397.05,228.15 2397.05,295.87 2464.76,295.87 2464.76,228.15 2600.2,228.15 2600.2,295.87 2532.48,295.87 2532.05,363.58 ; 2193.9,634.02 2261.61,634.45 2261.61,702.17 2329.33,702.17 2329.33,566.73 2261.61,566.73 2261.61,499.02 2329.33,499.02 2329.33,363.58 2261.61,363.58 2261.61,431.3 2126.18,431.3 2126.18,363.58 2193.9,363.58 2194.33,295.87 ; 2193.9,1109.45 2126.18,1109.45 2126.18,1041.73 2261.61,1041.73 2261.61,1109.45 2329.33,1109.45 2329.33,974.02 2261.61,974.02 2261.61,906.3 2329.33,906.3 2329.33,770.87 2261.61,770.87 2261.61,838.58 ; 2193.9,1447.6 2261.61,1448.03 2261.61,1515.75 2329.33,1515.75 2329.33,1380.32 2261.61,1380.32 2261.61,1312.6 2329.33,1312.6 2329.33,1177.17 2261.61,1177.17 2261.61,1244.88 2126.18,1244.88 2126.18,1177.17 2193.9,1177.17 2194.33,1109.45 ; 2463.78,3072.8 2531.5,3073.23 2531.5,3140.95 2599.21,3140.95 2599.21,3005.51 2531.5,3005.51 2531.5,2937.8 2666.93,2937.8 2666.93,3005.51 2734.65,3005.51 2734.65,2937.8 2870.08,2937.8 2870.08,3005.51 2802.36,3005.51 2801.93,3073.23 ; 2463.78,3073.23 2463.78,3140.95 2396.06,3140.95 2396.06,3005.51 2463.78,3005.51 2463.78,2937.8 2397.05,2937.8 2397.05,2802.36 2464.76,2802.36 2464.76,2870.08 2600.2,2870.08 2600.2,2802.36 2532.48,2802.36 ; 2463.78,3885.39 2531.5,3885.83 2531.5,3953.54 2599.21,3953.54 2599.21,3818.11 2531.5,3818.11 2531.5,3750.39 2734.65,3750.39 2734.65,3818.11 2666.93,3818.11 2666.93,3953.54 2734.65,3953.54 2734.65,3885.83 ; 2463.78,3885.83 2463.78,3953.54 2396.06,3953.54 2396.06,3818.11 2463.78,3818.11 2463.78,3750.39 2396.06,3750.39 2396.06,3614.96 2463.78,3614.96 2463.78,3682.68 2599.21,3682.68 2599.21,3614.96 2531.5,3614.96 ; 2464.76,634.02 2532.48,634.45 2532.48,702.17 2600.2,702.17 2600.2,566.73 2532.48,566.73 2532.48,499.02 2735.63,499.02 2735.63,566.73 2667.91,566.73 2667.91,702.17 2735.63,702.17 2735.63,634.45 ; 2464.76,634.45 2464.76,702.17 2397.05,702.17 2397.05,566.73 2464.76,566.73 2464.76,499.02 2397.05,499.02 2397.05,363.58 2464.76,363.58 2464.76,431.3 2600.2,431.3 2600.2,363.58 2532.48,363.58 ; 2464.76,1447.6 2532.48,1448.03 2532.48,1515.75 2600.2,1515.75 2600.2,1380.32 2532.48,1380.32 2532.48,1312.6 2667.91,1312.6 2667.91,1380.32 2735.63,1380.32 2735.63,1312.6 2871.06,1312.6 2871.06,1380.32 2803.35,1380.32 2802.91,1448.03 ; 2464.76,1448.03 2464.76,1515.75 2397.05,1515.75 2397.05,1380.32 2464.76,1380.32 2464.76,1312.6 2397.05,1312.6 2397.05,1177.17 2464.76,1177.17 2464.76,1244.88 2600.2,1244.88 2600.2,1177.17 2532.48,1177.17 ; 2464.76,2260.2 2532.48,2260.63 2532.48,2328.35 2600.2,2328.35 2600.2,2192.91 2532.48,2192.91 2532.48,2125.2 2735.63,2125.2 2735.63,2192.91 2667.91,2192.91 2667.91,2328.35 2735.63,2328.35 2735.63,2260.63 ; 2464.76,2260.63 2464.76,2328.35 2397.05,2328.35 2397.05,2192.91 2464.76,2192.91 2464.76,2125.2 2397.05,2125.2 2397.05,1989.76 2464.76,1989.76 2464.76,2057.48 2600.2,2057.48 2600.2,1989.76 2532.48,1989.76 ; 2531.06,3614.96 2531.5,3547.25 2599.21,3547.25 2599.21,3479.53 2463.78,3479.53 2463.78,3547.25 2396.06,3547.25 2396.06,3411.81 2463.78,3411.81 2463.78,3344.1 2396.06,3344.1 2396.06,3208.66 2463.78,3208.66 2463.78,3276.38 2531.5,3276.81 ; 2531.06,4428.54 2531.5,4360.83 2599.21,4360.83 2599.21,4293.11 2463.78,4293.11 2463.78,4360.83 2396.06,4360.83 2396.06,4225.39 2463.78,4225.39 2463.78,4157.68 2396.06,4157.68 2396.06,4022.25 2463.78,4022.25 2463.78,4089.96 2531.5,4090.39 ; 2531.5,3276.38 2531.5,3208.66 2599.21,3208.66 2599.21,3344.1 2531.5,3344.1 2531.5,3411.81 2666.93,3411.81 2666.93,3344.1 2734.65,3344.1 2734.65,3411.81 2870.08,3411.81 2870.08,3344.1 2802.36,3344.1 ; 2531.5,4089.96 2531.5,4022.25 2599.21,4022.25 2599.21,4157.68 2531.5,4157.68 2531.5,4225.39 2734.65,4225.39 2734.65,4157.68 2666.93,4157.68 2666.93,4022.25 2734.65,4022.25 2734.65,4089.96 2802.36,4090.39 ; 2532.05,1177.17 2532.48,1109.45 2600.2,1109.45 2600.2,1041.73 2464.76,1041.73 2464.76,1109.45 2397.05,1109.45 2397.05,974.02 2464.76,974.02 2464.76,906.3 2397.05,906.3 2397.05,770.87 2464.76,770.87 2464.76,838.58 2532.48,839.02 ; 2532.05,1989.76 2532.48,1922.05 2600.2,1922.05 2600.2,1854.33 2464.76,1854.33 2464.76,1922.05 2397.05,1922.05 2397.05,1786.62 2464.76,1786.62 2464.76,1718.9 2397.05,1718.9 2397.05,1583.47 2464.76,1583.47 2464.76,1651.18 2532.48,1651.62 ; 2532.05,2802.36 2532.48,2734.65 2600.2,2734.65 2600.2,2666.93 2464.76,2666.93 2464.76,2734.65 2397.05,2734.65 2397.05,2599.21 2464.76,2599.21 2464.76,2531.5 2397.05,2531.5 2397.05,2396.06 2464.76,2396.06 2464.76,2463.78 2532.48,2464.21 ; 2532.48,838.58 2532.48,770.87 2600.2,770.87 2600.2,906.3 2532.48,906.3 2532.48,974.02 2735.63,974.02 2735.63,906.3 2667.91,906.3 2667.91,770.87 2735.63,770.87 2735.63,838.58 2803.35,839.02 ; 2532.48,1651.18 2532.48,1583.47 2600.2,1583.47 2600.2,1718.9 2532.48,1718.9 2532.48,1786.62 2667.91,1786.62 2667.91,1718.9 2735.63,1718.9 2735.63,1786.62 2871.06,1786.62 2871.06,1718.9 2803.35,1718.9 ; 2532.48,2463.78 2532.48,2396.06 2600.2,2396.06 2600.2,2531.5 2532.48,2531.5 2532.48,2599.21 2735.63,2599.21 2735.63,2531.5 2667.91,2531.5 2667.91,2396.06 2735.63,2396.06 2735.63,2463.78 2803.35,2464.21 ; 2734.65,3547.25 2666.93,3547.25 2666.93,3479.53 2802.36,3479.53 2802.36,3547.25 2870.08,3547.25 2870.08,3480.51 3005.51,3480.51 3005.51,3548.23 2937.8,3548.23 2937.8,3683.66 3005.51,3683.66 3005.51,3615.95 ; 2734.65,3885.39 2802.36,3885.83 2802.36,3953.54 2870.08,3953.54 2870.08,3818.11 2802.36,3818.11 2802.36,3750.39 2870.08,3750.39 2870.08,3614.96 2802.36,3614.96 2802.36,3682.68 2666.93,3682.68 2666.93,3614.96 2734.65,3614.96 2735.08,3547.25 ; 2734.65,4360.83 2666.93,4360.83 2666.93,4293.11 2802.36,4293.11 2802.36,4360.83 2870.08,4360.83 2870.08,4225.39 2802.36,4225.39 2802.36,4157.68 2870.08,4157.68 2870.08,4022.25 2802.36,4022.25 2802.36,4089.96 ; 2735.08,4360.83 2734.65,4428.54 2666.93,4428.54 2666.93,4496.26 2802.36,4496.26 2802.36,4428.54 2870.08,4428.54 2870.08,4496.26 3005.51,4496.26 3005.51,4428.54 2937.8,4428.54 2937.8,4293.11 3005.51,4293.11 3005.51,4360.83 3073.23,4361.26 ; 2735.63,295.87 2667.91,295.87 2667.91,228.15 2803.35,228.15 2803.35,295.87 2871.06,295.87 2871.06,229.13 3006.5,229.13 3006.5,296.85 2938.78,296.85 2938.78,432.28 3006.5,432.28 3006.5,364.57 ; 2735.63,634.02 2803.35,634.45 2803.35,702.17 2871.06,702.17 2871.06,566.73 2803.35,566.73 2803.35,499.02 2871.06,499.02 2871.06,363.58 2803.35,363.58 2803.35,431.3 2667.91,431.3 2667.91,363.58 2735.63,363.58 2736.06,295.87 ; 2735.63,1109.45 2667.91,1109.45 2667.91,1041.73 2803.35,1041.73 2803.35,1109.45 2871.06,1109.45 2871.06,974.02 2803.35,974.02 2803.35,906.3 2871.06,906.3 2871.06,770.87 2803.35,770.87 2803.35,838.58 ; 2735.63,1922.05 2667.91,1922.05 2667.91,1854.33 2803.35,1854.33 2803.35,1922.05 2871.06,1922.05 2871.06,1854.33 2938.78,1854.33 2938.78,1922.05 3006.5,1922.05 3006.5,1854.33 3141.93,1854.33 3141.93,1922.05 3074.21,1922.05 3073.78,1989.76 ; 2735.63,2260.2 2803.35,2260.63 2803.35,2328.35 2871.06,2328.35 2871.06,2192.91 2803.35,2192.91 2803.35,2125.2 2871.06,2125.2 2871.06,1989.76 2803.35,1989.76 2803.35,2057.48 2667.91,2057.48 2667.91,1989.76 2735.63,1989.76 2736.06,1922.05 ; 2735.63,2734.65 2667.91,2734.65 2667.91,2666.93 2803.35,2666.93 2803.35,2734.65 2871.06,2734.65 2871.06,2599.21 2803.35,2599.21 2803.35,2531.5 2871.06,2531.5 2871.06,2396.06 2803.35,2396.06 2803.35,2463.78 ; 2736.06,1109.45 2735.63,1177.17 2667.91,1177.17 2667.91,1244.88 2803.35,1244.88 2803.35,1177.17 2871.06,1177.17 2871.06,1244.88 3006.5,1244.88 3006.5,1177.17 2938.78,1177.17 2938.78,1041.73 3006.5,1041.73 3006.5,1109.45 3074.21,1109.88 ; 2736.06,2734.65 2735.63,2802.36 2667.91,2802.36 2667.91,2870.08 2803.35,2870.08 2803.35,2802.36 2871.06,2802.36 2871.06,2870.08 2938.78,2870.08 2938.78,2802.36 3006.5,2802.36 3006.5,2870.08 3141.93,2870.08 3141.93,2802.36 3074.21,2802.36 ; 2801.93,3344.1 2802.36,3276.38 2870.08,3276.38 2870.08,3208.66 2734.65,3208.66 2734.65,3276.38 2666.93,3276.38 2666.93,3073.23 2734.65,3073.23 2734.65,3140.95 2870.08,3140.95 2870.08,3073.23 2802.36,3073.23 ; 2802.91,1718.9 2803.35,1651.18 2871.06,1651.18 2871.06,1583.47 2735.63,1583.47 2735.63,1651.18 2667.91,1651.18 2667.91,1448.03 2735.63,1448.03 2735.63,1515.75 2871.06,1515.75 2871.06,1448.03 2803.35,1448.03 ; 3005.51,3615.51 3073.23,3615.95 3073.23,3683.66 3140.95,3683.66 3140.95,3548.23 3073.23,3548.23 3073.23,3480.51 3208.66,3480.51 3208.66,3548.23 3276.38,3548.23 3276.38,3480.51 3411.81,3480.51 3411.81,3548.23 3344.1,3548.23 3343.66,3615.95 ; 3005.51,4157.24 3073.23,4157.68 3073.23,4225.39 3140.95,4225.39 3140.95,4089.96 3073.23,4089.96 3073.23,4022.24 3208.66,4022.24 3208.66,4089.96 3276.38,4089.96 3276.38,4022.25 3411.81,4022.25 3411.81,4089.96 3344.1,4089.96 3343.66,4157.68 ; 3005.51,4157.68 3005.51,4225.39 2937.8,4225.39 2937.8,4089.96 3005.51,4089.96 3005.51,4022.24 2937.8,4022.24 2937.8,3954.53 3005.51,3954.53 3005.51,3886.81 2937.8,3886.81 2937.8,3751.38 3005.51,3751.38 3005.51,3819.1 3073.23,3819.53 ; 3006.5,364.13 3074.21,364.57 3074.21,432.28 3141.93,432.28 3141.93,296.85 3074.21,296.85 3074.21,229.13 3209.65,229.13 3209.65,296.85 3277.36,296.85 3277.36,229.13 3412.8,229.13 3412.8,296.85 3345.08,296.85 3344.65,364.57 ; 3006.5,905.87 3074.21,906.3 3074.21,974.02 3141.93,974.02 3141.93,838.58 3074.21,838.58 3074.21,770.87 3209.65,770.87 3209.65,838.58 3277.36,838.58 3277.36,770.87 3412.8,770.87 3412.8,838.58 3345.08,838.58 3344.65,906.3 ; 3006.5,906.3 3006.5,974.02 2938.78,974.02 2938.78,838.58 3006.5,838.58 3006.5,770.87 2938.78,770.87 2938.78,703.15 3006.5,703.15 3006.5,635.43 2938.78,635.43 2938.78,500 3006.5,500 3006.5,567.72 3074.21,568.15 ; 3006.5,2260.2 3074.21,2260.63 3074.21,2328.35 3141.93,2328.35 3141.93,2192.91 3074.21,2192.91 3074.21,2125.2 3277.36,2125.2 3277.36,2192.91 3209.65,2192.91 3209.65,2328.35 3277.36,2328.35 3277.36,2260.63 ; 3006.5,2260.63 3006.5,2328.35 2938.78,2328.35 2938.78,2192.91 3006.5,2192.91 3006.5,2125.2 2938.78,2125.2 2938.78,1989.76 3006.5,1989.76 3006.5,2057.48 3141.93,2057.48 3141.93,1989.76 3074.21,1989.76 ; 3006.5,3005.51 2938.78,3005.51 2938.78,2937.8 3074.21,2937.8 3074.21,3005.51 3141.93,3005.51 3141.93,2937.8 3277.36,2937.8 3277.36,3005.51 3209.65,3005.51 3209.65,3140.95 3277.36,3140.95 3277.36,3073.23 ; 3006.5,3276.38 2938.78,3276.38 2938.78,3208.66 3074.21,3208.66 3074.21,3276.38 3141.93,3276.38 3141.93,3073.23 3074.21,3073.23 3074.21,3140.95 2938.78,3140.95 2938.78,3073.23 3006.5,3073.23 3006.93,3005.51 ; 3006.93,3276.38 3006.5,3344.1 2938.78,3344.1 2938.78,3411.81 3074.21,3411.81 3074.21,3344.1 3141.93,3344.1 3141.93,3411.81 3277.36,3411.81 3277.36,3344.1 3209.65,3344.1 3209.65,3208.66 3277.36,3208.66 3277.36,3276.38 3345.08,3276.81 ; 3007.48,1380.32 2939.76,1380.32 2939.76,1312.6 3075.2,1312.6 3075.2,1380.32 3142.91,1380.32 3142.91,1312.6 3278.35,1312.6 3278.35,1380.32 3210.63,1380.32 3210.63,1515.75 3278.35,1515.75 3278.35,1448.03 ; 3007.48,1651.18 2939.76,1651.18 2939.76,1583.47 3075.2,1583.47 3075.2,1651.18 3142.91,1651.18 3142.91,1448.03 3075.2,1448.03 3075.2,1515.75 2939.76,1515.75 2939.76,1448.03 3007.48,1448.03 3007.91,1380.32 ; 3007.91,1651.18 3007.48,1718.9 2939.76,1718.9 2939.76,1786.61 3075.2,1786.61 3075.2,1718.9 3142.91,1718.9 3142.91,1786.61 3278.35,1786.61 3278.35,1718.9 3210.63,1718.9 3210.63,1583.47 3278.35,1583.47 3278.35,1651.18 3346.06,1651.61 ; 3073.23,3819.1 3073.23,3751.38 3140.95,3751.38 3140.95,3886.81 3073.23,3886.81 3073.23,3954.53 3208.66,3954.53 3208.66,3886.81 3276.38,3886.81 3276.38,3954.53 3411.81,3954.53 3411.81,3886.81 3344.1,3886.81 ; 3073.23,4360.83 3073.23,4293.11 3140.95,4293.11 3140.95,4428.54 3073.23,4428.54 3073.23,4496.26 3208.66,4496.26 3208.66,4428.54 3276.38,4428.54 3276.38,4496.26 3411.81,4496.26 3411.81,4428.54 3344.1,4428.54 ; 3073.78,2802.36 3074.21,2734.65 3141.93,2734.65 3141.93,2666.93 3006.5,2666.93 3006.5,2734.65 2938.78,2734.65 2938.78,2599.21 3006.5,2599.21 3006.5,2531.5 2938.78,2531.5 2938.78,2396.06 3006.5,2396.06 3006.5,2463.78 3074.21,2464.21 ; 3074.21,567.72 3074.21,500 3141.93,500 3141.93,635.43 3074.21,635.43 3074.21,703.15 3209.65,703.15 3209.65,635.43 3277.36,635.43 3277.36,703.15 3412.8,703.15 3412.8,635.43 3345.08,635.43 ; 3074.21,1109.45 3074.21,1041.73 3141.93,1041.73 3141.93,1177.17 3074.21,1177.17 3074.21,1244.88 3209.65,1244.88 3209.65,1177.17 3277.36,1177.17 3277.36,1244.88 3412.8,1244.88 3412.8,1177.17 3345.08,1177.17 ; 3074.21,2463.78 3074.21,2396.06 3141.93,2396.06 3141.93,2531.5 3074.21,2531.5 3074.21,2599.21 3277.36,2599.21 3277.36,2531.5 3209.65,2531.5 3209.65,2396.06 3277.36,2396.06 3277.36,2463.78 3345.08,2464.21 ; 3277.36,1922.05 3209.65,1922.05 3209.65,1854.33 3345.08,1854.33 3345.08,1922.05 3412.8,1922.05 3412.8,1786.61 3346.06,1786.61 3346.06,1718.9 3413.78,1718.9 3413.78,1583.47 3346.06,1583.47 3346.06,1651.18 ; 3277.36,2260.2 3345.08,2260.63 3345.08,2328.35 3412.8,2328.35 3412.8,2192.91 3345.08,2192.91 3345.08,2125.2 3412.8,2125.2 3412.8,1989.76 3345.08,1989.76 3345.08,2057.48 3209.65,2057.48 3209.65,1989.76 3277.36,1989.76 3277.8,1922.05 ; 3277.36,2734.65 3209.65,2734.65 3209.65,2666.93 3345.08,2666.93 3345.08,2734.65 3412.8,2734.65 3412.8,2599.21 3345.08,2599.21 3345.08,2531.5 3412.8,2531.5 3412.8,2396.06 3345.08,2396.06 3345.08,2463.78 ; 3277.36,3072.8 3345.08,3073.23 3345.08,3140.95 3412.8,3140.95 3412.8,3005.51 3345.08,3005.51 3345.08,2937.8 3412.8,2937.8 3412.8,2802.36 3345.08,2802.36 3345.08,2870.08 3209.65,2870.08 3209.65,2802.36 3277.36,2802.36 3277.8,2734.65 ; 3278.35,1447.6 3346.06,1448.03 3346.06,1515.75 3413.78,1515.75 3413.78,1380.32 3346.06,1380.32 3346.06,1312.6 3549.21,1312.6 3549.21,1380.32 3481.5,1380.32 3481.5,1515.75 3549.21,1515.75 3549.21,1448.03 ; 3343.66,3886.81 3344.1,3819.1 3411.81,3819.1 3411.81,3751.38 3276.38,3751.38 3276.38,3819.1 3208.66,3819.1 3208.66,3615.95 3276.38,3615.95 3276.38,3683.66 3411.81,3683.66 3411.81,3615.95 3344.1,3615.95 ; 3343.66,4428.54 3344.1,4360.83 3411.81,4360.83 3411.81,4293.11 3276.38,4293.11 3276.38,4360.83 3208.66,4360.83 3208.66,4157.68 3276.38,4157.68 3276.38,4225.39 3411.81,4225.39 3411.81,4157.68 3344.1,4157.68 ; 3344.65,635.43 3345.08,567.72 3412.8,567.72 3412.8,500 3277.36,500 3277.36,567.72 3209.65,567.72 3209.65,364.57 3277.36,364.57 3277.36,432.28 3412.8,432.28 3412.8,364.57 3345.08,364.57 ; 3344.65,1177.17 3345.08,1109.45 3412.8,1109.45 3412.8,1041.73 3277.36,1041.73 3277.36,1109.45 3209.65,1109.45 3209.65,906.3 3277.36,906.3 3277.36,974.02 3412.8,974.02 3412.8,906.3 3345.08,906.3 ; 3345.08,3276.38 3345.08,3208.66 3412.8,3208.66 3412.8,3344.1 3345.08,3344.1 3345.08,3411.81 3548.23,3411.81 3548.23,3344.1 3480.51,3344.1 3480.51,3208.66 3548.23,3208.66 3548.23,3276.38 3615.95,3276.81 ; 3548.23,3072.8 3615.95,3073.23 3615.95,3140.95 3683.66,3140.95 3683.66,3005.51 3615.95,3005.51 3615.95,2937.8 3751.38,2937.8 3751.38,3005.51 3819.09,3005.51 3819.09,2937.8 3954.53,2937.8 3954.53,3005.51 3886.81,3005.51 3886.38,3073.23 ; 3548.23,3073.23 3548.23,3140.95 3480.51,3140.95 3480.51,3005.51 3548.23,3005.51 3548.23,2937.8 3481.5,2937.8 3481.5,2802.36 3549.21,2802.36 3549.21,2870.08 3684.65,2870.08 3684.65,2802.36 3616.93,2802.36 ; 3549.21,1447.6 3616.93,1448.03 3616.93,1515.75 3684.65,1515.75 3684.65,1380.32 3616.93,1380.32 3616.93,1312.6 3752.36,1312.6 3752.36,1380.32 3820.08,1380.32 3820.08,1312.6 3955.51,1312.6 3955.51,1380.32 3887.8,1380.32 3887.36,1448.03 ; 3549.21,2260.2 3616.93,2260.63 3616.93,2328.35 3684.65,2328.35 3684.65,2192.91 3616.93,2192.91 3616.93,2125.2 3820.08,2125.2 3820.08,2192.91 3752.36,2192.91 3752.36,2328.35 3820.08,2328.35 3820.08,2260.63 ; 3549.21,2260.63 3549.21,2328.35 3481.5,2328.35 3481.5,2192.91 3549.21,2192.91 3549.21,2125.2 3481.5,2125.2 3481.5,1989.76 3549.21,1989.76 3549.21,2057.48 3684.65,2057.48 3684.65,1989.76 3616.93,1989.76 ; 3549.21,3547.24 3481.5,3547.24 3481.5,3479.53 3616.93,3479.53 3616.93,3547.24 3684.65,3547.24 3684.65,3479.53 3820.08,3479.53 3820.08,3547.24 3752.36,3547.24 3752.36,3682.68 3820.08,3682.68 3820.08,3614.96 ; 3549.21,3818.11 3481.5,3818.11 3481.5,3750.39 3616.93,3750.39 3616.93,3818.11 3684.65,3818.11 3684.65,3614.96 3616.93,3614.96 3616.93,3682.68 3481.5,3682.68 3481.5,3614.96 3549.21,3614.96 3549.65,3547.24 ; 3549.21,4088.98 3481.5,4088.98 3481.5,4021.26 3616.93,4021.26 3616.93,4088.98 3684.65,4088.98 3684.65,4021.26 3820.08,4021.26 3820.08,4088.98 3752.36,4088.98 3752.36,4224.41 3820.08,4224.41 3820.08,4156.69 ; 3549.21,4359.84 3481.5,4359.84 3481.5,4292.13 3616.93,4292.13 3616.93,4359.84 3684.65,4359.84 3684.65,4156.69 3616.93,4156.69 3616.93,4224.41 3481.5,4224.41 3481.5,4156.69 3549.21,4156.69 3549.65,4088.98 ; 3549.65,3818.11 3549.21,3885.83 3481.5,3885.83 3481.5,3953.54 3616.93,3953.54 3616.93,3885.83 3684.65,3885.83 3684.65,3953.54 3820.08,3953.54 3820.08,3885.83 3752.36,3885.83 3752.36,3750.39 3820.08,3750.39 3820.08,3818.11 3887.8,3818.54 ; 3549.65,4359.84 3549.21,4427.56 3481.5,4427.56 3481.5,4495.28 3616.93,4495.28 3616.93,4427.56 3684.65,4427.56 3684.65,4495.28 3820.08,4495.28 3820.08,4427.56 3752.36,4427.56 3752.36,4292.13 3820.08,4292.13 3820.08,4359.84 3887.8,4360.28 ; 3550.2,295.87 3482.48,295.87 3482.48,228.15 3617.91,228.15 3617.91,295.87 3685.63,295.87 3685.63,228.15 3821.06,228.15 3821.06,295.87 3753.35,295.87 3753.35,431.3 3821.06,431.3 3821.06,363.58 ; 3550.2,566.73 3482.48,566.73 3482.48,499.02 3617.91,499.02 3617.91,566.73 3685.63,566.73 3685.63,363.58 3617.91,363.58 3617.91,431.3 3482.48,431.3 3482.48,363.58 3550.2,363.58 3550.63,295.87 ; 3550.2,837.6 3482.48,837.6 3482.48,769.88 3617.91,769.88 3617.91,837.6 3685.63,837.6 3685.63,769.88 3821.06,769.88 3821.06,837.6 3753.35,837.6 3753.35,973.03 3821.06,973.03 3821.06,905.32 ; 3550.2,1108.47 3482.48,1108.47 3482.48,1040.75 3617.91,1040.75 3617.91,1108.47 3685.63,1108.47 3685.63,905.32 3617.91,905.32 3617.91,973.03 3482.48,973.03 3482.48,905.32 3550.2,905.32 3550.63,837.6 ; 3550.63,566.73 3550.2,634.45 3482.48,634.45 3482.48,702.17 3617.91,702.17 3617.91,634.45 3685.63,634.45 3685.63,702.17 3821.06,702.17 3821.06,634.45 3753.35,634.45 3753.35,499.02 3821.06,499.02 3821.06,566.73 3888.78,567.17 ; 3550.63,1108.47 3550.2,1176.18 3482.48,1176.18 3482.48,1243.9 3617.91,1243.9 3617.91,1176.18 3685.63,1176.18 3685.63,1243.9 3821.06,1243.9 3821.06,1176.18 3753.35,1176.18 3753.35,1040.75 3821.06,1040.75 3821.06,1108.47 3888.78,1108.9 ; 3615.95,3276.38 3615.95,3208.66 3683.66,3208.66 3683.66,3344.1 3615.95,3344.1 3615.95,3411.81 3751.38,3411.81 3751.38,3344.1 3819.09,3344.1 3819.09,3411.81 3954.53,3411.81 3954.53,3344.1 3886.81,3344.1 ; 3616.5,1989.76 3616.93,1922.05 3684.65,1922.05 3684.65,1854.33 3549.21,1854.33 3549.21,1922.05 3481.5,1922.05 3481.5,1786.61 3549.21,1786.61 3549.21,1718.9 3481.5,1718.9 3481.5,1583.47 3549.21,1583.47 3549.21,1651.18 3616.93,1651.61 ; 3616.5,2802.36 3616.93,2734.65 3684.65,2734.65 3684.65,2666.93 3549.21,2666.93 3549.21,2734.65 3481.5,2734.65 3481.5,2599.21 3549.21,2599.21 3549.21,2531.5 3481.5,2531.5 3481.5,2396.06 3549.21,2396.06 3549.21,2463.78 3616.93,2464.21 ; 3616.93,1651.18 3616.93,1583.47 3684.65,1583.47 3684.65,1718.9 3616.93,1718.9 3616.93,1786.61 3752.36,1786.61 3752.36,1718.9 3820.08,1718.9 3820.08,1786.61 3955.51,1786.61 3955.51,1718.9 3887.8,1718.9 ; 3616.93,2463.78 3616.93,2396.06 3684.65,2396.06 3684.65,2531.5 3616.93,2531.5 3616.93,2599.21 3820.08,2599.21 3820.08,2531.5 3752.36,2531.5 3752.36,2396.06 3820.08,2396.06 3820.08,2463.78 3887.8,2464.21 ; 3820.08,1922.05 3752.36,1922.05 3752.36,1854.33 3887.8,1854.33 3887.8,1922.05 3955.51,1922.05 3955.51,1854.33 4023.23,1854.33 4023.23,1922.05 4090.95,1922.05 4090.95,1854.33 4226.38,1854.33 4226.38,1922.05 4158.66,1922.05 4158.23,1989.76 ; 3820.08,2260.2 3887.8,2260.63 3887.8,2328.35 3955.51,2328.35 3955.51,2192.91 3887.8,2192.91 3887.8,2125.2 3955.51,2125.2 3955.51,1989.76 3887.8,1989.76 3887.8,2057.48 3752.36,2057.48 3752.36,1989.76 3820.08,1989.76 3820.51,1922.05 ; 3820.08,2734.65 3752.36,2734.65 3752.36,2666.93 3887.8,2666.93 3887.8,2734.65 3955.51,2734.65 3955.51,2599.21 3887.8,2599.21 3887.8,2531.5 3955.51,2531.5 3955.51,2396.06 3887.8,2396.06 3887.8,2463.78 ; 3820.08,3614.53 3887.8,3614.96 3887.8,3682.68 3955.51,3682.68 3955.51,3547.24 3887.8,3547.24 3887.8,3479.53 4023.23,3479.53 4023.23,3547.24 4090.94,3547.24 4090.94,3479.53 4226.38,3479.53 4226.38,3547.24 4158.66,3547.24 4158.23,3614.96 ; 3820.08,4156.26 3887.8,4156.69 3887.8,4224.41 3955.51,4224.41 3955.51,4088.98 3887.8,4088.98 3887.8,4021.26 3955.51,4021.26 3955.51,3953.54 3887.8,3953.54 3887.8,3885.83 3955.51,3885.83 3955.51,3750.39 3887.8,3750.39 3887.8,3818.11 ; 3820.51,2734.65 3820.08,2802.36 3752.36,2802.36 3752.36,2870.08 3887.8,2870.08 3887.8,2802.36 3955.51,2802.36 3955.51,2870.08 4023.23,2870.08 4023.23,2802.36 4090.94,2802.36 4090.94,2870.08 4226.38,2870.08 4226.38,2802.36 4158.66,2802.36 ; 3821.06,363.15 3888.78,363.58 3888.78,431.3 3956.5,431.3 3956.5,295.87 3888.78,295.87 3888.78,228.15 4024.21,228.15 4024.21,295.87 4091.93,295.87 4091.93,228.15 4227.36,228.15 4227.36,295.87 4159.65,295.87 4159.21,363.58 ; 3821.06,904.88 3888.78,905.32 3888.78,973.03 3956.5,973.03 3956.5,837.6 3888.78,837.6 3888.78,769.88 3956.5,769.88 3956.5,702.17 3888.78,702.17 3888.78,634.45 3956.5,634.45 3956.5,499.02 3888.78,499.02 3888.78,566.73 ; 3886.38,3344.1 3886.81,3276.38 3954.53,3276.38 3954.53,3208.66 3819.09,3208.66 3819.09,3276.38 3751.38,3276.38 3751.38,3073.23 3819.09,3073.23 3819.09,3140.95 3954.53,3140.95 3954.53,3073.23 3886.81,3073.23